# Altium PCB FMTrans.PcbDoc
Units mm, origin at the board's own origin, x right, y up, seen from the top; angles counter-clockwise.
Board outline 120 x 50 mm, 2 copper layers (Top Layer, Bottom Layer); 51 components, 46 nets, 194 pads, 106 vias.
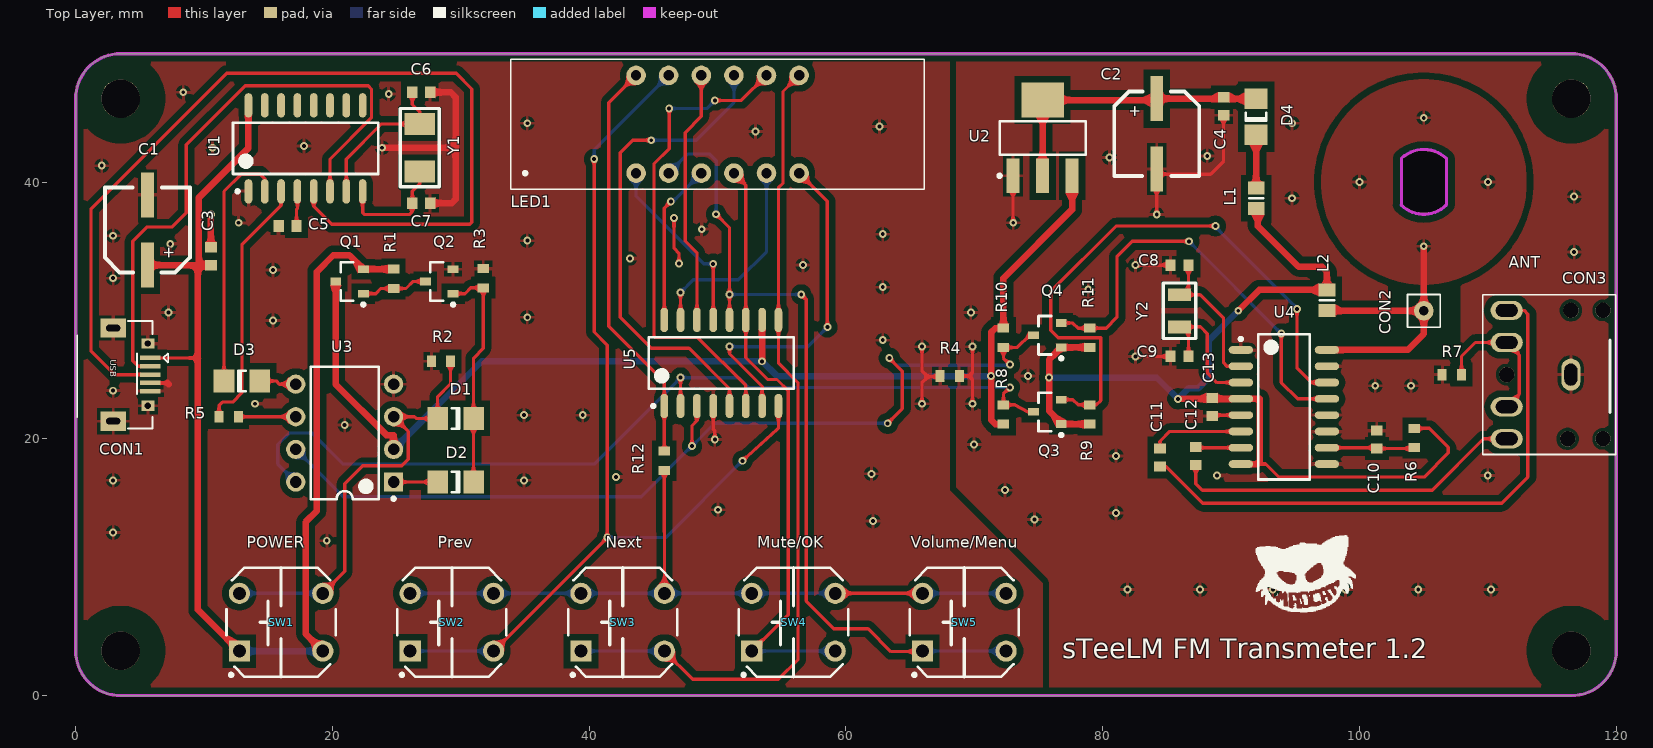
[diagram p0: Top Layer view]
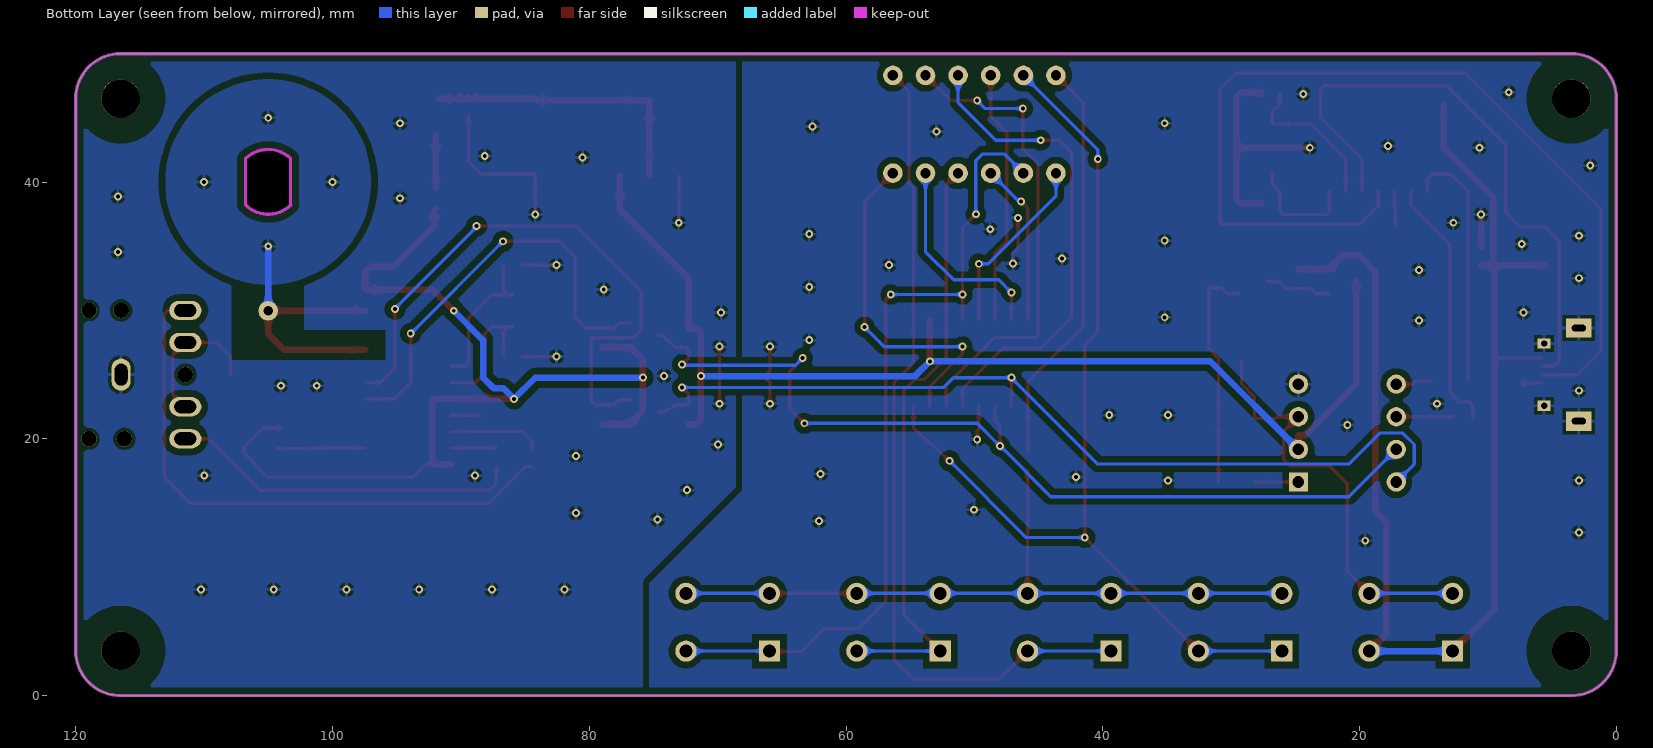
[diagram p1: Bottom Layer view, seen from below]

## Layer stack, top to bottom
Top Solder: solder mask 0.0102, Solder Resist, Dk 3.5
Top Layer: signal copper 0.0356
Dielectric 1: dielectric 0.32, FR-4, Dk 4.8
Bottom Layer: signal copper 0.0356
Bottom Solder: solder mask 0.0102, Solder Resist, Dk 3.5

## Board outline
0,3.5 0,46.5 cw(c3.5,46.5) 3.5,50 116.5,50 cw(c116.5,46.5) 120,46.5 120,3.5 cw(c116.5,3.5) 116.5,0 3.5,0 cw(c3.5,3.5)
cut-out: 103.25,38.215 ccw(c105,40) 106.75,38.215 106.75,41.785 ccw(c105,40) 103.299,41.832 103.25,41.832

## Design rules (kind name [scope] priority, off if disabled: settings)
Clearance [All] p1: gap=0.254 ignorepadtopadclearanceinfootprint=FALSE except(0.508: Arc-Poly Track-Poly SMDPad-Poly THPad-Poly Via-Poly Fill-Poly Poly-Poly)
HoleSize [All] p1: absolutevalues=TRUE maxlimit=5 minlimit=0.025 maxpercent=80.000 minpercent=20.000
MinimumSolderMaskSliver MinimumSolderMaskSliver_USB [HasFootprint('USB-micro_B') vs HasFootprint('USB-micro_B')] p1: minsoldermaskwidth=0.09
MinimumSolderMaskSliver [All] p2: minsoldermaskwidth=0.254
PolygonConnect [All] p1: connectstyle=Relief reliefconductorwidth=0.254 reliefentries=4 polygonreliefangle="90 Angle" airgapwidth=0.254
RoutingPriority RoutingPriority_I2C [InNetClass('I2C')] p1: routingpriority=0
RoutingPriority RoutingPriority_Power [InNetClass('Power')] p2: routingpriority=1
RoutingPriority RoutingPriority_Serial [InNetClass('Serial')] p3: routingpriority=2
RoutingPriority [All] p4: routingpriority=10
RoutingVias [All] p1: holewidth=0.305 width=0.61 viastyle="Through Hole" minholewidth=0.305 minwidth=0.61 maxholewidth=3 maxwidth=5
SMDEntry SMDEntry_USB [HasFootprint('USB-micro_B')] p1: side=FALSE corner=FALSE anyangle=FALSE
SMDEntry SMDEntry_SOT223 [HasFootprint('SOT223-4M')] p2: side=TRUE corner=TRUE anyangle=TRUE
SMDEntry SMDEntry_SOP16 [HasFootprint('SOP127P762-16L')] p3: side=FALSE corner=FALSE anyangle=FALSE
SMDEntry [All] p4: side=TRUE corner=TRUE anyangle=TRUE
SilkToSolderMaskClearance SilkToSolderMaskClearance_XTAL5032 [HasFootprint('XTAL-5032') vs HasFootprint('XTAL-5032')] p1: minsilkscreentomaskgap=0.19 clearancetoexposedcopper=TRUE
SilkToSolderMaskClearance SilkToSolderMaskClearance_XTAL_3215 [HasFootprint('XTAL-3215') vs HasFootprint('XTAL-3215')] p2: minsilkscreentomaskgap=0.19 clearancetoexposedcopper=TRUE
SilkToSolderMaskClearance SilkToSolderMaskClearance_SOT223-4M [HasFootprint('SOT223-4M') vs HasFootprint('SOT223-4M')] p3: minsilkscreentomaskgap=0.2 clearancetoexposedcopper=TRUE
SilkToSolderMaskClearance SilkToSolderMaskClearance_SW [HasFootprint('SW/PB-V4/H7.1') vs HasFootprint('SW/PB-V4/H7.1')] p4: minsilkscreentomaskgap=0.2 clearancetoexposedcopper=TRUE
SilkToSolderMaskClearance SilkToSolderMaskClearance_L [HasFootprint('RESC2012L') vs HasFootprint('RESC2012L')] p5: minsilkscreentomaskgap=0.2 clearancetoexposedcopper=TRUE
SilkToSolderMaskClearance SilkToSolderMaskClearance_DID [HasFootprint('CD3216-1206') vs HasFootprint('CD3216-1206')] p6: minsilkscreentomaskgap=0.2 clearancetoexposedcopper=TRUE
SilkToSolderMaskClearance SilkToSolderMaskClearance_USB [HasFootprint('USB-micro_B') vs HasFootprint('USB-micro_B')] p7: minsilkscreentomaskgap=0.09 clearancetoexposedcopper=TRUE
SilkToSolderMaskClearance [IsPad] p8: minsilkscreentomaskgap=0.254 clearancetoexposedcopper=TRUE
SolderMaskExpansion [All] p1: expansion=0.102 istentingtop=FALSE
SupplyNets "Schematic Supply Nets_4" [InNet('V3O')] p1: voltage=0.000
SupplyNets "Schematic Supply Nets_3" [InNet('GND')] p2: voltage=0.000
SupplyNets "Schematic Supply Nets_2" [InNet('+5')] p3: voltage=0.000
SupplyNets "Schematic Supply Nets_1" [InNet('AGND')] p4: voltage=0.000
SupplyNets "Schematic Supply Nets" [InNet('VMCU')] p5: voltage=0.000
Width Power [InNetClass('Power')] p1: maxlimit=0.508 minlimit=0.254 preferedwidth=0.508
Width [not InNetClass('Power')] p2: maxlimit=0.508 minlimit=0.254 preferedwidth=0.254
26 further rules are at their usual default settings.

## Classes and differential pairs
net class Serial: RXD TXD
net class I2C: SCL SCL3 SDA SDA3
net class Power: +5 V3 V3O VMCU

## Components (designator, comment, footprint, x,y, rotation, side; value= is the part's Value field where it differs from the comment)
C1 "Cap Pol1" SMD-EC-F6.3 5.588,33.528 r90 top value=100uF,25V
C2 "Cap Pol1" SMD-EC-F6.3 84.201,46.496 r270 top value=100uF,25V
C3 "Cap" CAPC1608L 10.541,34.228 r270 top value=104
C4 "Cap" CAPC1608L 89.408,45.909 r90 top value=104
C5 "Cap" CAPC1608L 16.51,36.576 r0 top value=104
C6 "Cap" CAPC1608L 26.924,46.99 r180 top value=220
C7 "Cap" CAPC1608L 26.924,38.354 r180 top value=220
C8 "Cap" CAPC1608L 85.979,33.528 r0 top value=150
C9 "Cap" CAPC1608L 85.979,26.416 r0 top value=150
C10 "Cap" CAPC1608L 101.346,19.942 r90 top value=104
C11 "Cap" CAPC1608L 84.455,18.542 r90 top value=104
C12 "Cap" CAPC1608L 87.249,18.669 r90 top value=104
C13 "Cap" CAPC1608L 88.519,22.479 r90 top value=104
CON1 "USB-mrico" USB-micro_B 2.921,25 r270 top locked
CON2 "ANT" ANT 105,29.972 r90 top
CON3 "HEADPHONE_3.5" 3F07 116.459,25 r180 top locked
D1 "1N4148" CD3216-1206 29.591,21.59 r0 top
D2 "1N4148" CD3216-1206 29.591,16.637 r0 top
D3 "1N4148" CD3216-1206 12.954,24.511 r180 top
D4 "M4" CD3216-1206 91.948,45.085 r270 top
L1 "Inductor" RESC2012L 91.948,38.735 r270 top value=30R
L2 "Inductor" RESC2012L 97.457,30.8 r90 top value=120nH
LED1 "HSN2481" HSN2481 50,44.5 r0 top locked
Q1 "AO3401,A19T" SOT-23B_L 21.336,32.258 r180 top
Q2 "AO3400,A09T" SOT-23B_L 28.321,32.258 r180 top
Q3 "AO3400,A09T" SOT-23B_L 75.692,22.098 r180 top
Q4 "AO3400,A09T" SOT-23B_L 75.692,28.067 r180 top
R1 "Res2" RESC1608L 24.765,32.458 r90 top value=3M
R2 "Res2" RESC1608L 28.448,26.035 r0 top value=10K
R3 "Res2" RESC1608L 31.75,32.512 r270 top value=3M
R4 "Res2" RESC1608L 68.072,24.892 r180 top value=0R
R5 "Res2" RESC1608L 11.926,21.717 r180 top value=300R
R6 "Res2" RESC1608L 104.267,20.066 r90 top value=1K
R7 "Res2" RESC1608L 107.188,25 r180 top value=10K
R8 "Res2" RESC1608L 72.263,21.898 r270 top value=10K
R9 "Res2" RESC1608L 78.994,21.898 r270 top value=10K
R10 "Res2" RESC1608L 72.263,27.867 r90 top value=10K
R11 "Res2" RESC1608L 78.994,27.867 r270 top value=10K
R12 "Res2" RESC1608L 45.847,18.288 r90 top value=2K
SW1 "SW" SW/PB-V4/H7.1 16.002,5.715 r0 top
SW2 "NEG" SW/PB-V4/H7.1 29.305,5.715 r0 top
SW3 "PLUS" SW/PB-V4/H7.1 42.608,5.715 r0 top
SW4 "OK" SW/PB-V4/H7.1 55.912,5.715 r0 top
SW5 "MENU" SW/PB-V4/H7.1 69.215,5.715 r0 top
U1 "CH340G" SOP127P762-16L 17.907,42.624 r90 top
U2 "AMS1117" SOT223-4M 75.311,43.434 r90 top
U3 "STC8G1K17A" DIP-8 20.955,20.447 r180 top
U4 "KT0803L" SOP127P762-16L 94.107,22.479 r0 top
U5 "TM1650" SOP127P762-16L 50.292,25.908 r90 top
Y1 "12M" XTAL-5032 26.797,42.672 r90 top
Y2 "32.768K" XTAL-3215 85.979,29.972 r270 top

## Footprints (in the part's own frame and the unit in brackets; to place one, negate y for a bottom-side part, rotate by r counter-clockwise, add the part's x,y. Pads: shape width x height; smd on the part's side, far side on the other; paste and mask are expansions set on the pad)
3F07 [mm]
  round 1.2 hole 1.2 mask+0: 0(-2.5,5) 0(-2.5,-5) 0(0,-5) 0(0.25,5) 0(5,0)
  oval 1.5x2.5 hole 1 slot 1.7 at 90 deg: 1(0,0)
  oval 2.5x1.5 hole 1 slot 1.7 at 0 deg: 2(5,5) 3(5,2.5) 4(5,-2.5) 5(5,-5)
  silkscreen extent -3.5,-6.22 6.86,6.22
ANT [mil] "ANT"
  round 60 hole 30: 1(0,0)
  silkscreen extent -50,-50 50,50
CAPC1608L [mm] "Chip Capacitor, Body 1.6x0.8mm, IPC High Density"
  rect 0.8x0.9 smd: 1(-0.7,0) 2(0.7,0)
  body extent -0.87,-0.48 0.87,0.48, height 0.85
CD3216-1206 [mm] "Chip Diode; Body 3.2 x 1.6 mm (LxW typ)"
  rect 1.6x1.8 smd: 1(-1.4,0) 2(1.4,0)
  silkscreen extent -0.3,-0.8 0.3,0.8
DIP-8 [mm] "DIP; 8 Leads; Row Spacing 7.62 mm; Pitch 2.54 mm"
  rect 1.5x1.5 hole 0.9: 1(-3.81,3.81)
  round 1.5 hole 0.9: 2(-3.81,1.27) 3(-3.81,-1.27) 4(-3.81,-3.81) 5(3.81,-3.81) 6(3.81,-1.27) 7(3.81,1.27) 8(3.81,3.81)
  silkscreen extent -3.94,-5.15 2.65,5.23, body extent -3.6,-5.15 3.6,5.15, height 5.08
HSN2481 [mil] "HSN2481"
  round 60 hole 31.5: 1(-250,-150) 2(-150,-150) 3(-50,-150) 4(50,-150) 5(150,-150) 6(250,-150) 7(250,150) 8(150,150) 9(50,150) 10(-50,150) 11(-150,150) 12(-250,150)
  silkscreen extent -634,-199 634,199
RESC1608L [mm] "Chip Resistor, Body 1.6x0.8mm, IPC High Density"
  rect 0.7x0.9 smd: 1(-0.75,0) 2(0.75,0)
  body extent -0.85,-0.48 0.85,0.48, height 0.6
RESC2012L [mm] "Chip Resistor, Body 2.0x1.3mm, IPC High Density"
  rect 1x1.3 smd: 1(-0.8,0) 2(0.8,0)
  silkscreen extent 0,-0.55 0,0.55, body extent -1.07,-0.7 1.07,0.7, height 0.65
SMD-EC-F6.3 [mm]
  rect 3.5x1 smd: 1(0,0) 2(5.475,0)
  silkscreen extent -0.56,-3.31 6.04,3.31
SOP127P762-16L [mm] "16-Pin Small Outline Package 1.27 mm Pitch"
  oval 1.9x0.6 smd: 1(-3.35,4.445) 2(-3.35,3.175) 3(-3.35,1.905) 4(-3.35,0.635) 5(-3.35,-0.635) 6(-3.35,-1.905) 7(-3.35,-3.175) 8(-3.35,-4.445) 9(3.35,-4.445) 10(3.35,-3.175) 11(3.35,-1.905) 12(3.35,-0.635) 13(3.35,0.635) 14(3.35,1.905) 15(3.35,3.175) 16(3.35,4.445)
  silkscreen extent -3.47,-5.65 2,5.65, body extent -2.85,-5.65 2.85,5.65, height 2.2
SOT223-4M [mm] "SOT223, 4-Leads, Body 6.5x3.5mm, Pitch 2.3mm, Lead Span 7mm, IPC Low Density"
  rect 2.7x1 smd: 1(-2.95,2.3) 2(-2.95,0) 3(-2.95,-2.3)
  rect 2.7x3.3 smd: 4(2.95,0)
  silkscreen extent -3.07,-3.35 1.3,3.47, body extent -1.85,-3.35 1.85,3.35, height 1.8
SOT-23B_L [mm] "SOT23, 3-Leads, Body 2.9x1.3mm, Pitch 0.95mm, Lead Span 2.4mm, IPC High Density"
  rect 0.85x0.6 smd: 1(-1.075,0.95) 2(-1.075,-0.95) 3(1.075,0)
  silkscreen extent -1.2,-1.5 0.7,1.92, body extent -0.7,-1.5 0.7,1.5, height 1.14
SW/PB-V4/H7.1 [mm] "Switch, Push Button, Thru-Hole; 4 Leads; Body 8.5 x 8.5 mm (LxW typ); Row Spacing 9.0 mm; Pitch 4.5 mm"
  rect 1.65x1.65 hole 1: 1(-3.25,-2.25)
  round 1.65 hole 1: 2(3.25,-2.25) 3(-3.25,2.25) 4(3.25,2.25)
  silkscreen extent -4.25,-4.25 4.25,4.25
USB-micro_B [mm] "micro型USB ，5.7*7.8*2.5mm"
  rect 0.35x1.6 smd: 1(-1.3,2.9) 2(-0.65,2.9) 3(0,2.9) 4(0.65,2.9) 5(1.3,2.9)
  rect 1.5x2 hole 0.5 slot 1.1 at 90 deg: 5(-3.625,0) 5(3.625,0)
  rect 0.8x1 hole 0.5: 5(-2.425,2.71) 5(2.425,2.71)
  silkscreen extent -4.19,-2.79 4.19,4.3, body extent -4,-2.71 4,2.89, height 2.8
XTAL-3215 [mm]
  rect 1x1.8 smd: 1(-1.25,0) 2(1.25,0)
  silkscreen extent -2.16,-1.27 2.16,1.27
XTAL-5032 [mm]
  rect 1.7x2.4 smd: 1(-1.85,0) 2(1.85,0)
  silkscreen extent -3.05,-1.52 3.05,1.52

## Part data
C1 C2: "Polarized Capacitor (Radial)", LatestRevisionDate=17-Jul-2002, LatestRevisionNote="Re-released for DXP Platform.", PackageDescription="Polarized Capacitor (Radial); 2 Leads", PackageReference=RB7.6-15, Published=8-Jun-2000, Publisher="Altium Limited"
C3 C4 C5 C6 C7 C8 C9 C10 C11 C12 C13: "Capacitor", LatestRevisionDate=17-Jul-2002, LatestRevisionNote="Re-released for DXP Platform.", PackageDescription="Radial Cap, Thru-Hole; 2 Leads; 0.3 in Pin Spacing", PackageReference=RAD-0.3, Published=8-Jun-2000, Publisher="Altium Limited"
CON1: library part USB_MICRO_B
D1 D2 D3: library part Diode, Code_JEDEC=DO-214-AB, LatestRevisionDate=17-Jul-2002, LatestRevisionNote="Re-released for DXP Platform.", PackageDescription="DO-214-AB/SMC; 2 C-Bend Leads; Body 7.9 x 5.9 mm, inc. leads (LxW)", PackageReference=SMC, PackageVersion=Sep-1996, Published=8-Jun-2000, Publisher="Altium Limited"
D4: library part Diode, "1N4148", Code_JEDEC=DO-214-AB, LatestRevisionDate=17-Jul-2002, LatestRevisionNote="Re-released for DXP Platform.", PackageDescription="DO-214-AB/SMC; 2 C-Bend Leads; Body 7.9 x 5.9 mm, inc. leads (LxW)", PackageReference=SMC, PackageVersion=Sep-1996, Published=8-Jun-2000, Publisher="Altium Limited"
Q1: library part PMOS-2, "P-Channel Power MOSFET", ComponentLink1Description="Manufacturer Link", ComponentLink1URL=http://www.irf.com/, DatasheetVersion=PD-9.390D, LatestRevisionDate=17-Jul-2002, LatestRevisionNote="Re-released for DXP Platform.", Note="Pin 4 not drawn and electrically connected to Pin 2.", PackageDescription="TO, Thru-Hole, Vertical, Heatsink Mounted; 3 In-Line Leads; Pitch 2.54 mm", PackageReference=TO-220AB, PackageVersion=Feb-1997, Published=8-Jun-2000, Publisher="Altium Limited"
Q2 Q3 Q4: library part NMOS-2, "N-Channel Power MOSFET", ComponentLink1Description="Manufacturer Link", ComponentLink1URL=http://www.irf.com/, DatasheetVersion=PD-9.814, LatestRevisionDate=17-Jul-2002, LatestRevisionNote="Re-released for DXP Platform.", Note="Pin 2 is electrically connected to pin 4.", PackageDescription="TO, Thru-Hole, Vertical, Heatsink Mounted; 3 In-Line Leads; Pitch 2.54 mm", PackageReference=TO-220AB, PackageVersion=Feb-1997, Published=8-Jun-2000, Publisher="Altium Limited"
R1 R2 R3 R4 R5 R6 R7 R8 R9 R10 R11 R12: "Resistor", LatestRevisionDate=17-Jul-2002, LatestRevisionNote="Re-released for DXP Platform.", PackageDescription="Axial Device, Thru-Hole; 2 Leads; 0.4 in Pin Spacing", PackageReference=AXIAL-0.4, Published=8-Jun-2000, Publisher="Altium Limited"
SW2 SW3 SW4 SW5: library part SW, "SW"
Y1 Y2: library part XTAL, "Crystal Oscillator", LatestRevisionDate=17-Jul-2002, LatestRevisionNote="Re-released for DXP Platform.", PackageDescription="Crystal, Thru-Hole; 2 Leads; Body 3.1 x 8.2 mm (Dia.xH)", PackageReference=R38, Published=8-Jun-2000, Publisher="Altium Limited"
L1 L2: Code_IEC=1005, Code_JEITA=0402, LatestRevisionDate=29-May-2009, LatestRevisionNote="IPC-7351 Footprint Added.", PackageDescription="Chip Inductor", PackageReference=0402-A, Published=8-Jun-2000, Publisher="Altium Limited"

## Free pads (board coordinates)
  round 3 hole 3: 0(3.5,3.5) 0(3.5,46.5) 0(116.5,3.5) 0(116.5,46.5)

## Via types
v1: diameter 0.61, hole 0.305, Top Layer to Bottom Layer, 106 vias

## Nets (pads, with @x,y where several pads share a name; then routed paths per layer and width w, separated by ;. In a path a pad name is that pad's centre, name@x,y a point inside that pad or via, vN(x,y) a via of type N, cw(c..) or ccw(c..) an arc to the next point about the centre after c; other vN are vias at no path point)
+5: C1.1 C3.2 CON1.1 Q1.2 R1.2 SW1.1 SW1.2 U1.16 | length 98
  Top Layer w0.254: CON1.1 6.621,26.3 6.632,26.289 9.525,26.289
  Top Layer w0.508: C1.1 9.525,33.528 ; 9.576,33.528 9.576,38.76 13.462,42.647 U1.16 ; C3.2 9.525,33.528 ; SW1.1 9.525,6.692 9.525,26.289 9.525,33.528 ; SW1.2 17.907,4.81 17.907,13.513 18.796,14.402 18.796,33.02 20.066,34.29 21.329,34.29 Q1.2 R1.2
  Bottom Layer w0.508: SW1.1 SW1.2
A: LED1.11 SW2.1 SW2.2 U5.8 | length 76.4
  Top Layer w0.254: SW2.2 v1(41.402,12.312) 41.402,27.305 40.386,28.321 v1(40.386,41.783) ; v1(51.936,18.288) 54.658,20.744 54.663,20.749 54.737,20.823 U5.8
  Bottom Layer w0.254: SW2.1 SW2.2 ; v1(40.386,41.783) 40.386,42.506 LED1.11 ; v1(41.402,12.312) 45.96,12.312 v1(51.936,18.288)
AGND: C2.2 C4.1 C8.1 C9.1 C10.2 C13.1 CON3.1 R4.1 R7.2 U2.1 U4.1 U4.5 U4.9 U4.11 U4.12 U4.15 | length 29.2
  Top Layer w0.254: R4.1 69.574,24.892 ; v1(69.85,22.733) 69.85,24.616 69.574,24.892 ; v1(69.85,27.178) 69.85,25.168 69.574,24.892 ; U2.1 73.011,36.844 v1(73.025,36.83) ; v1(82.55,26.416) C9.1 ; v1(82.55,33.528) C8.1 ; v1(84.201,37.465) C2.2@84.201,40.615 ; C2.2@84.201,40.626 C2.2@84.201,40.615 ; C13.1 88.584,21.844 U4.5 ; C4.1 89.408,41.631 88.392,40.615 C2.2@84.201,40.615
  other v1: 81.915,8.255 87.579,8.255 93.243,8.255 98.908,8.255 104.572,8.255 110.236,8.255 74.676,13.716 81.026,14.224 72.39,16.002 88.9,17.145 109.982,17.145 81.026,18.669 69.977,19.558 101.219,24.13 104.013,24.13 74.168,24.892 69.723,29.845 78.867,31.623 116.713,34.544 94.742,38.735 116.713,38.862 80.518,41.91 88.138,42.037 94.742,44.577
B: LED1.7 SW3.1 SW3.2 U5.9 | length 65.3
  Top Layer w0.254: SW3.2 48.053,1.27 54.737,1.27 56.261,2.794 56.261,24.384 54.737,25.908 U5.9 54.737,39.548 55.093,39.903 55.093,47.053 LED1.7
  Bottom Layer w0.254: SW3.1 SW3.2
C: LED1.4 SW4.1 SW4.2 U5.11 | length 47.1
  Top Layer w0.254: LED1.4 52.197,39.763 U5.11 52.197,26.335 53.911,24.62 54.628,24.62 55.499,23.749 55.499,6.302 SW4.1
  Bottom Layer w0.254: SW4.1 SW4.2
D: LED1.2 SW5.1 SW5.2 U5.12 | length 64.2
  Top Layer w0.254: v1(49.886,37.49) 50.927,36.449 v1(50.927,31.242) U5.12 ; v1(56.515,31.242) 56.896,30.861 56.896,7.366 59.055,5.207 61.722,5.207 63.5,3.429 65.929,3.429 SW5.1
  Bottom Layer w0.254: LED1.2 47.689,42.189 49.352,42.189 49.886,41.656 v1(49.886,37.49) ; v1(50.927,31.242) v1(56.515,31.242) ; SW5.1 SW5.2
D1: LED1.12 R12.2 U5.1 | length 31.9
  Top Layer w0.254: LED1.12 41.529,46.189 41.529,28.757 45.847,24.439 U5.1 R12.2
DP: LED1.3 U5.16 | length 12.7
  Top Layer w0.254: U5.16 45.847,37.973 v1(46.355,38.481)
  Bottom Layer w0.254: v1(46.355,38.481) 46.423,38.549 46.589,38.549 LED1.3
E: LED1.1 U5.13 | length 14.4
  Top Layer w0.254: U5.13 v1(49.657,33.63)
  Bottom Layer w0.254: LED1.1 43.65,38.9 48.92,33.63 v1(49.657,33.63)
F: LED1.10 U5.14 | length 20
  Top Layer w0.254: U5.14 48.387,34.493 47.473,35.408 47.473,43.853 48.73,45.11 LED1.10
G: LED1.5 U5.15 | length 16.3
  Top Layer w0.254: U5.15 v1(47.117,31.394)
  Bottom Layer w0.254: v1(47.117,31.394) 48.108,32.385 51.613,32.385 53.81,34.582 LED1.5
GND: C1.2 C3.1 C5.1 C6.1 C7.1 CON1.4 CON1.5 Q2.2 R2.1 R3.1 R4.2 U1.1 U3.4 U5.4 | length 34.3
  Top Layer w0.254: CON1.4 7.146,24.35 ; v1(46.609,37.211) 46.609,34.833 46.99,34.452 v1(46.99,33.655) ; U5.4 49.657,20.752 49.784,20.625 v1(49.784,19.939) ; v1@65.913,22.606 65.913,24.373 66.381,24.841 ; v1@65.913,27.051 65.913,25.309 66.381,24.841 ; R4.2 67.271,24.841 66.381,24.841
  Top Layer w0.508: 7.146,24.35 7.239,24.257 ; C3.1 v1(10.541,37.465) ; v1(23.876,42.672) 29.591,42.672 ; C7.1 29.293,38.354 29.591,38.652 29.591,42.672 ; C6.1@27.77,46.819 27.624,46.965 C6.1 29.21,46.99 29.591,46.609 29.591,42.672 ; v1@46.609,37.183 v1(46.609,37.211)
  other v1: 19.558,12.065 2.921,12.7 62.103,13.589 50.038,14.478 2.921,16.764 34.925,16.764 42.088,17.018 61.976,17.272 20.955,21.082 34.925,21.844 39.497,21.844 13.97,22.733 65.913,22.733 2.921,23.749 65.913,27.178 62.865,27.686 15.367,29.21 35.179,29.464 7.239,29.845 62.865,31.813 2.921,32.512 15.367,33.147 56.642,33.528 43.18,34.036 7.366,35.179 35.179,35.433 2.921,35.814 62.865,35.941 48.768,36.322 12.7,36.83 2.032,41.275 10.668,42.672 17.78,42.799 52.959,43.942 62.611,44.323 35.179,44.577 24.384,46.863 8.382,46.99
KEY_PRESS: D1.1 R2.2 SW1.3 SW1.4 U3.3 | length 33.6
  Top Layer w0.254: SW1.4 20.955,9.668 20.955,16.51 22.352,17.907 25.4,17.907 25.908,18.415 25.908,20.574 U3.3 26.391,21.717 26.518,21.59 D1.1 28.191,23.292 29.198,24.299 R2.2
  Bottom Layer w0.254: SW1.3 SW1.4
NetC5_2: C5.2 U1.4 | length 2.7
  Top Layer w0.254: C5.2 17.21,37.871 17.272,37.933 U1.4
NetC6_2: C6.2 U1.7 Y1.2 | length 12.1
  Top Layer w0.254: U1.7 21.082,41.783 23.821,44.522 Y1.2 26.797,45.466 26.224,46.039 C6.2
NetC7_2: C7.2 U1.8 Y1.1 | length 9.1
  Top Layer w0.254: U1.8 22.352,37.614 22.501,37.465 25.996,37.465 26.202,37.672 26.202,38.332 C7.2 ; C7.2@26.224,38.304 26.224,39.294 26.797,39.867 Y1.1
NetC8_2: C8.2 U4.2 Y2.1 | length 11.6
  Top Layer w0.254: Y2.1 86.119,31.222 Y2.1@86.34,31.222 ; C8.2 86.679,31.561 Y2.1@86.34,31.222 ; U4.2 89.662,25.654 89.408,25.908 89.408,29.388 87.574,31.222 Y2.1@86.34,31.222
NetC9_2: C9.2 U4.3 Y2.2 | length 10.8
  Top Layer w0.254: Y2.2 Y2.2@86.306,28.722 ; C9.2 86.679,28.349 Y2.2@86.306,28.722 ; U4.3 88.893,24.384 88.138,25.139 88.138,28.194 87.61,28.722 Y2.2@86.306,28.722
NetC10_1: C10.1 R6.1 U4.10 | length 6.9
  Top Layer w0.254: U4.10 101.284,19.304 C10.1 104.193,19.242 R6.1
NetC11_1: C11.1 CON3.5 | length 45.1
  Top Layer w0.254: C11.1 84.938,17.842 87.794,14.986 111.074,14.986 113.106,17.018 113.106,29.718 112.824,30 CON3.5
NetC11_2: C11.2 U4.6 | length 7.2
  Top Layer w0.254: C11.2 84.455,19.812 85.217,20.574 U4.6
NetC12_1: C12.1 CON3.2 | length 27.4
  Top Layer w0.254: C12.1@87.249,17.842 87.249,16.51 87.757,16.002 105.654,16.002 109.652,20 CON3.2
NetC12_2: C12.2 U4.7 | length 3.5
  Top Layer w0.254: C12.2 87.314,19.304 U4.7
NetCON1_2: CON1.2 U1.6 | length 47
  Top Layer w0.254: CON1.2 4.881,25.65 4.445,26.086 4.445,35.382 5.563,36.5 7.518,36.5 8.611,37.592 8.611,42.901 13.208,47.498 22.784,47.498 23.038,47.244 23.038,45.009 19.812,41.783 U1.6
NetCON1_3: CON1.3 U1.5 | length 75.5
  Top Layer w0.254: CON1.3 3.042,25 1.194,26.848 1.194,37.897 11.76,48.463 29.642,48.463 30.861,47.244 30.861,36.852 30.712,36.703 19.939,36.703 18.542,38.1 U1.5
NetCON2_1: CON2.1 L2.1 U4.16 | length 27.5
  Top Layer w0.254: L2.1 L2.1@97.485,29.972
  Top Layer w0.508: U4.16 103.759,26.924 105,28.165 CON2.1 ; L2.1@97.485,29.972 CON2.1 ; v1(105,35) CON2.1
  Bottom Layer w0.508: CON2.1 v1(105,35)
  other v1: 100,40 110,40 105,45
NetCON3_3: CON3.3 CON3.4 R7.1 | length 11.2
  Top Layer w0.254: R7.1 107.938,26.416 109.022,27.5 CON3.4 112.446,26.513 112.446,23.487 CON3.3
NetD1_2: D1.2 D2.2 Q2.1 R3.2 | length 18
  Top Layer w0.254: Q2.1 30.328,31.308 30.782,31.762 R3.2 31.75,27.048 30.991,26.289 D1.2 D2.2
NetD3_1: D3.1 U3.5 | length 2.9
  Top Layer w0.254: D3.1 15.621,24.511 15.875,24.257 U3.5
NetD4_2: D4.2 L1.1 | length 4.2
  Top Layer w0.508: L1.1 D4.2
NetLED1_6: LED1.6 U5.7 | length 26.8
  Top Layer w0.254: v1(50.927,27.178) 50.927,26.613 53.467,24.073 U5.7 ; LED1.6 58.547,38.493 v1(58.547,28.702)
  Bottom Layer w0.254: v1(50.927,27.178) 57.023,27.178 v1(58.547,28.702)
NetLED1_8: LED1.8 U5.6 | length 37.2
  Top Layer w0.254: v1(46.228,45.722) 46.228,42.595 45.047,41.414 45.047,28.034 45.191,27.889 48.463,27.889 52.197,24.155 U5.6 ; v1(49.784,46.355) 51.855,46.355 LED1.8
  Bottom Layer w0.254: v1(46.228,45.722) 49.151,45.722 v1(49.784,46.355)
NetLED1_9: LED1.9 U5.5 | length 37.6
  Top Layer w0.254: v1(44.831,43.256) 43.383,43.256 42.418,42.291 42.418,29.464 44.831,27.051 47.777,27.051 50.927,23.901 U5.5
  Bottom Layer w0.254: v1(44.831,43.256) 48.336,43.256 51.27,46.19 LED1.9
NetQ1_1: Q1.1 Q2.3 R1.1 | length 5.2
  Top Layer w0.254: Q1.1 23.368,31.308 23.768,31.708 R1.1 25.73,31.708 26.28,32.258 Q2.3
NetR5_1: R5.1 U3.6 | length 4.5
  Top Layer w0.254: R5.1 U3.6
NetR12_1: R12.1 SW2.3 SW2.4 SW3.3 SW3.4 SW4.3 SW4.4 SW5.3 SW5.4 | length 56
  Top Layer w0.254: R12.1 45.847,12.737 45.858,12.725 SW3.4 ; SW4.4 SW5.3
  Bottom Layer w0.254: SW2.3 SW2.4 SW3.3 SW3.4 SW4.3 SW4.4 ; SW5.3 SW5.4
POWER_EN: D2.1 U3.1 | length 3.4
  Top Layer w0.254: U3.1 D2.1
RXD: R5.2 U1.3 | length 20
  Top Layer w0.254: R5.2 11.176,22.606 11.43,22.86 12.243,22.86 12.954,23.571 12.954,35.128 16.002,38.176 U1.3
SCL: Q3.3 R8.1 U3.8 U5.2 | length 71.3
  Top Layer w0.254: U5.2 v1(47.117,24.765) ; v1(72.771,24.003) 72.263,23.495 R8.1 73.152,22.648 74.168,22.098 Q3.3
  Bottom Layer w0.254: U3.8 15.748,18.034 15.748,19.558 16.637,20.447 18.44,20.447 20.853,18.034 40.386,18.034 v1(47.117,24.765) 51.633,24.765 52.395,24.003 v1(72.771,24.003)
SCL3: Q3.2 R9.1 U4.14 | length 46.8
  Top Layer w0.254: Q3.2 77.673,23.048 78.073,22.648 R9.1 79.502,22.648 79.832,22.978 79.832,27.864 76.53,27.864 75.946,28.448 75.946,31.487 81.035,36.576 v1(88.773,36.576) ; v1(95.123,30.099) 95.123,25.527 96.266,24.384 U4.14
  Bottom Layer w0.254: v1(88.773,36.576) 88.773,36.513 95.123,30.163 v1(95.123,30.099)
SDA: Q4.3 R10.1 U3.7 U5.3 | length 73.2
  Top Layer w0.254: v1(48.006,19.431) 48.006,21.032 48.387,21.413 U5.3 ; v1(63.246,21.209) 64.389,22.352 64.389,25.273 v1(63.373,26.289) ; v1(72.771,25.781) 72.263,26.289 R10.1 73.345,27.117 74.295,28.067 Q4.3
  Bottom Layer w0.254: U3.7 20.828,15.494 44.044,15.494 v1@47.993,19.444 ; v1(48.006,19.431) 49.784,21.209 v1(63.246,21.209) ; v1(63.373,26.289) 63.932,25.73 72.72,25.73 v1(72.771,25.781)
SDA3: Q4.2 R11.1 U4.13 | length 33.7
  Top Layer w0.254: Q4.2 77.673,29.017 78.073,28.617 R11.1 80.264,28.617 81.102,29.455 81.102,34.188 82.296,35.382 v1(86.716,35.382) ; v1(93.904,28.194) 93.904,24.384 95.174,23.114 U4.13
  Bottom Layer w0.254: v1(86.716,35.382) v1(93.904,28.194)
TXD: D3.2 U1.2 | length 19.6
  Top Layer w0.254: D3.2 11.554,39.265 12.903,40.615 14.376,40.615 14.732,40.259 U1.2
V3: C2.1 C4.2 D4.1 U2.2 U2.4 | length 22.4
  Top Layer w0.508: U2.2 U2.4 84.089,46.384 C2.1 88.378,46.496 88.392,46.482 89.281,46.482 C4.2 ; C4.2@89.449,46.482 D4.1@91.721,46.482
V3O: C13.2 L1.2 L2.2 Q3.1 Q4.1 R6.2 R9.2 R11.2 U4.4 U4.8 | length 81.3
  Top Layer w0.254: 91.973,18.034 92.71,18.034 93.726,17.018 105.029,17.018 106.909,18.898 106.909,19.329 105.422,20.816 R6.2
  Top Layer w0.508: Q3.1 Q3.1@76.86,21.148 ; R9.2 Q3.1@76.86,21.148 ; R11.2 Q4.1 76.642,27.117 76.596,27.071 76.596,26.946 75.819,26.169 v1(75.819,24.765) 75.819,22.189 Q3.1@76.86,21.148 ; v1(85.852,23.114) U4.4 91.973,23.114 92.227,22.86 ; v1(90.551,29.972) 92.179,31.6 97.284,31.6 97.457,31.773 97.457,33.017 97.073,33.401 95.25,33.401 92.075,36.576 92.075,37.808 L1.2 ; U4.8 91.973,18.034 92.227,18.288 92.227,22.86 ; 92.227,23.114 92.227,22.86 ; R6.2@104.171,20.912 R6.2
  Bottom Layer w0.508: v1(75.819,24.765) 84.201,24.765 v1(85.852,23.114) 86.687,23.949 87.449,23.949 88.265,24.765 88.265,27.686 v1(90.551,29.972)
VMCU: Q1.3 R8.2 R10.2 U2.3 U3.2 U5.10 | length 91.5
  Top Layer w0.508: Q1.3 20.244,32.258 20.244,24.257 24.206,20.295 24.765,20.295 U3.2 ; v1(53.467,26.035) U5.10 ; R8.2 71.628,21.148 71.298,21.478 v1(71.298,24.883) 71.298,28.287 71.628,28.617 R10.2 72.263,32.512 77.611,37.86 U2.3
  Bottom Layer w0.508: U3.2 31.623,26.035 v1(53.467,26.035) 54.619,24.883 v1(71.298,24.883)
pads on no net: CON3.0 U1.9 U1.10 U1.11 U1.12 U1.13 U1.14 U1.15

## Polygon pours and split planes (outlines as drawn)
AGND on Top Layer "Top Layer-No Net" (solid, remove dead copper, pour order 3): 68.072,16.002 75.311,8.763 75.311,0 116.5,0 ccw(c116.5,3.5) 120,3.5 120,46.5 ccw(c116.5,46.5) 116.5,50 68.072,50
GND on Top Layer "GND_L01_P002" (solid, remove dead copper, pour order 2): 0,3.5 0,46.5 cw(c3.5,46.5) 3.5,50 68.072,50 68.072,16.002 75.311,8.763 75.311,0 3.5,0 cw(c3.5,3.5)
NetCON2_1 on Top Layer "Top Layer-NetL2_1" (solid, remove dead copper, pour order 1): 97,40 ccw(c105,40) 105,32 ccw(c105,40) 113,40 ccw(c105,40) 105,48 ccw(c105,40)
AGND on Bottom Layer "AGND_L02_P005" (solid, remove dead copper, pour order 5): 68.072,16.002 75.311,8.763 75.311,0 116.5,0 ccw(c116.5,3.5) 120,3.5 120,46.5 ccw(c116.5,46.5) 116.5,50 68.072,50
GND on Bottom Layer "Top Layer-GND" (solid, remove dead copper, pour order 0): 0,3.5 0,46.5 cw(c3.5,46.5) 3.5,50 68.072,50 68.072,16.002 75.311,8.763 75.311,0 3.5,0 cw(c3.5,3.5)
NetCON2_1 on Bottom Layer "NETCON2_1_L02_P004" (solid, remove dead copper, pour order 4): 97,40 ccw(c105,40) 105,32 ccw(c105,40) 113,40 ccw(c105,40) 105,48 ccw(c105,40)

## Keep-outs
Keep-Out Layer:
  lines w0.254: 103.244,38.208 ccw(c105,40) 106.756,38.208 ; 103.272,38.236 103.272,41.861 cw(c105,40) 106.778,41.814 106.778,38.23 ; 0,3.5 ccw(c3.5,3.5) 3.5,0 116.5,0 ccw(c116.5,3.5) 120,3.5 120,46.5 ccw(c116.5,46.5) 116.5,50 3.5,50 ccw(c3.5,46.5) 0,46.5 0,3.5

## Other copper
Top Layer:
  pour cut-out: 95.885,26.162 95.885,28.448 107.823,28.448 107.823,26.162
  pour cut-out: 102.235,28.448 102.235,31.877 107.823,31.877 107.823,28.448
Bottom Layer:
  pour cut-out: 95.885,26.162 95.885,28.448 107.823,28.448 107.823,26.162
  pour cut-out: 102.235,28.448 102.235,31.877 107.823,31.877 107.823,28.448
Multi-Layer:
  pour cut-out: 113,3.5 ccw(c116.5,3.5) 116.5,0 ccw(c116.5,3.5) 120,3.5 ccw(c116.5,3.5) 116.5,7 ccw(c116.5,3.5)
  pour cut-out: 113,46.5 ccw(c116.5,46.5) 116.5,43 ccw(c116.5,46.5) 120,46.5 ccw(c116.5,46.5) 116.5,50 ccw(c116.5,46.5)
  pour cut-out: 3.5,0 cw(c3.5,3.5) 0,3.5 cw(c3.5,3.5) 3.5,7 cw(c3.5,3.5) 7,3.5 cw(c3.5,3.5)
  pour cut-out: 3.5,43 cw(c3.5,46.5) 0,46.5 cw(c3.5,46.5) 3.5,50 cw(c3.5,46.5) 7,46.5 cw(c3.5,46.5)

## Silkscreen, mask and mechanical layers (free items; w line width, h text height)
Top Overlay:
  drawing of 8 lines, arcs and shapes, not listed
  text "ANT" at 111.633,33.02 h1.52
  text "POWER" at 13.335,11.191 h1.52
  text "Prev" at 28.194,11.208 h1.52
  text "Next" at 41.275,11.208 h1.52
  text "Mute/OK" at 53.086,11.191 h1.52
  text "Volume/Menu" at 65.025,11.192 h1.52
  text "sTeeLM FM Transmeter 1.2" at 76.835,2.921 h1.52
Top Solder:
  circle w5: c105,40 r4.3
Bottom Solder:
  circle w5: c105,40 r4.3
Mechanical 1:
  circle w0.254: c116.5,46.5 r3.5
  circle w0.254: c116.5,3.5 r3.5
  circle w0.254: c3.5,3.5 r3.5
  circle w0.254: c3.5,46.5 r3.5
Mechanical 15:
  circle w0.254: c105,40 r8
  lines w0.254: 120,46.5 ccw(c116.5,46.5) 116.5,50 68.072,50 ; 120,46.615 120,3.5 cw(c116.5,3.5) 116.5,0 75.311,0 ; 68.072,50 68.072,16.002 75.311,8.763 75.311,0 ; 68.072,50 3.5,50 ccw(c3.5,46.5) 0,46.5 0,3.5 ccw(c3.5,3.5) 3.5,0 75.311,0 ; 107.823,28.448 95.885,28.448 95.885,26.162 107.823,26.162 107.823,28.448 ; 107.823,28.448 102.235,28.448 102.235,31.877 107.823,31.877 107.823,28.448

## Text inside footprints (layer, text, board x,y; h text height)
C1: Top Overlay "+" at 7.965,34 h1.5 r90
C2: Top Overlay "+" at 81.824,46.024 h1.5 r270
CON1: Top Overlay "USB" at 2.54,26.143 h0.81 r270